# Altium PCB CPS.PcbDoc
Units mil, origin at the board's own origin, x right, y up, seen from the top; angles counter-clockwise.
Board outline 3149.61 x 3543.31 mil, 2 copper layers (Top Layer, Bottom Layer); 109 components, 77 nets, 353 pads, 68 vias.
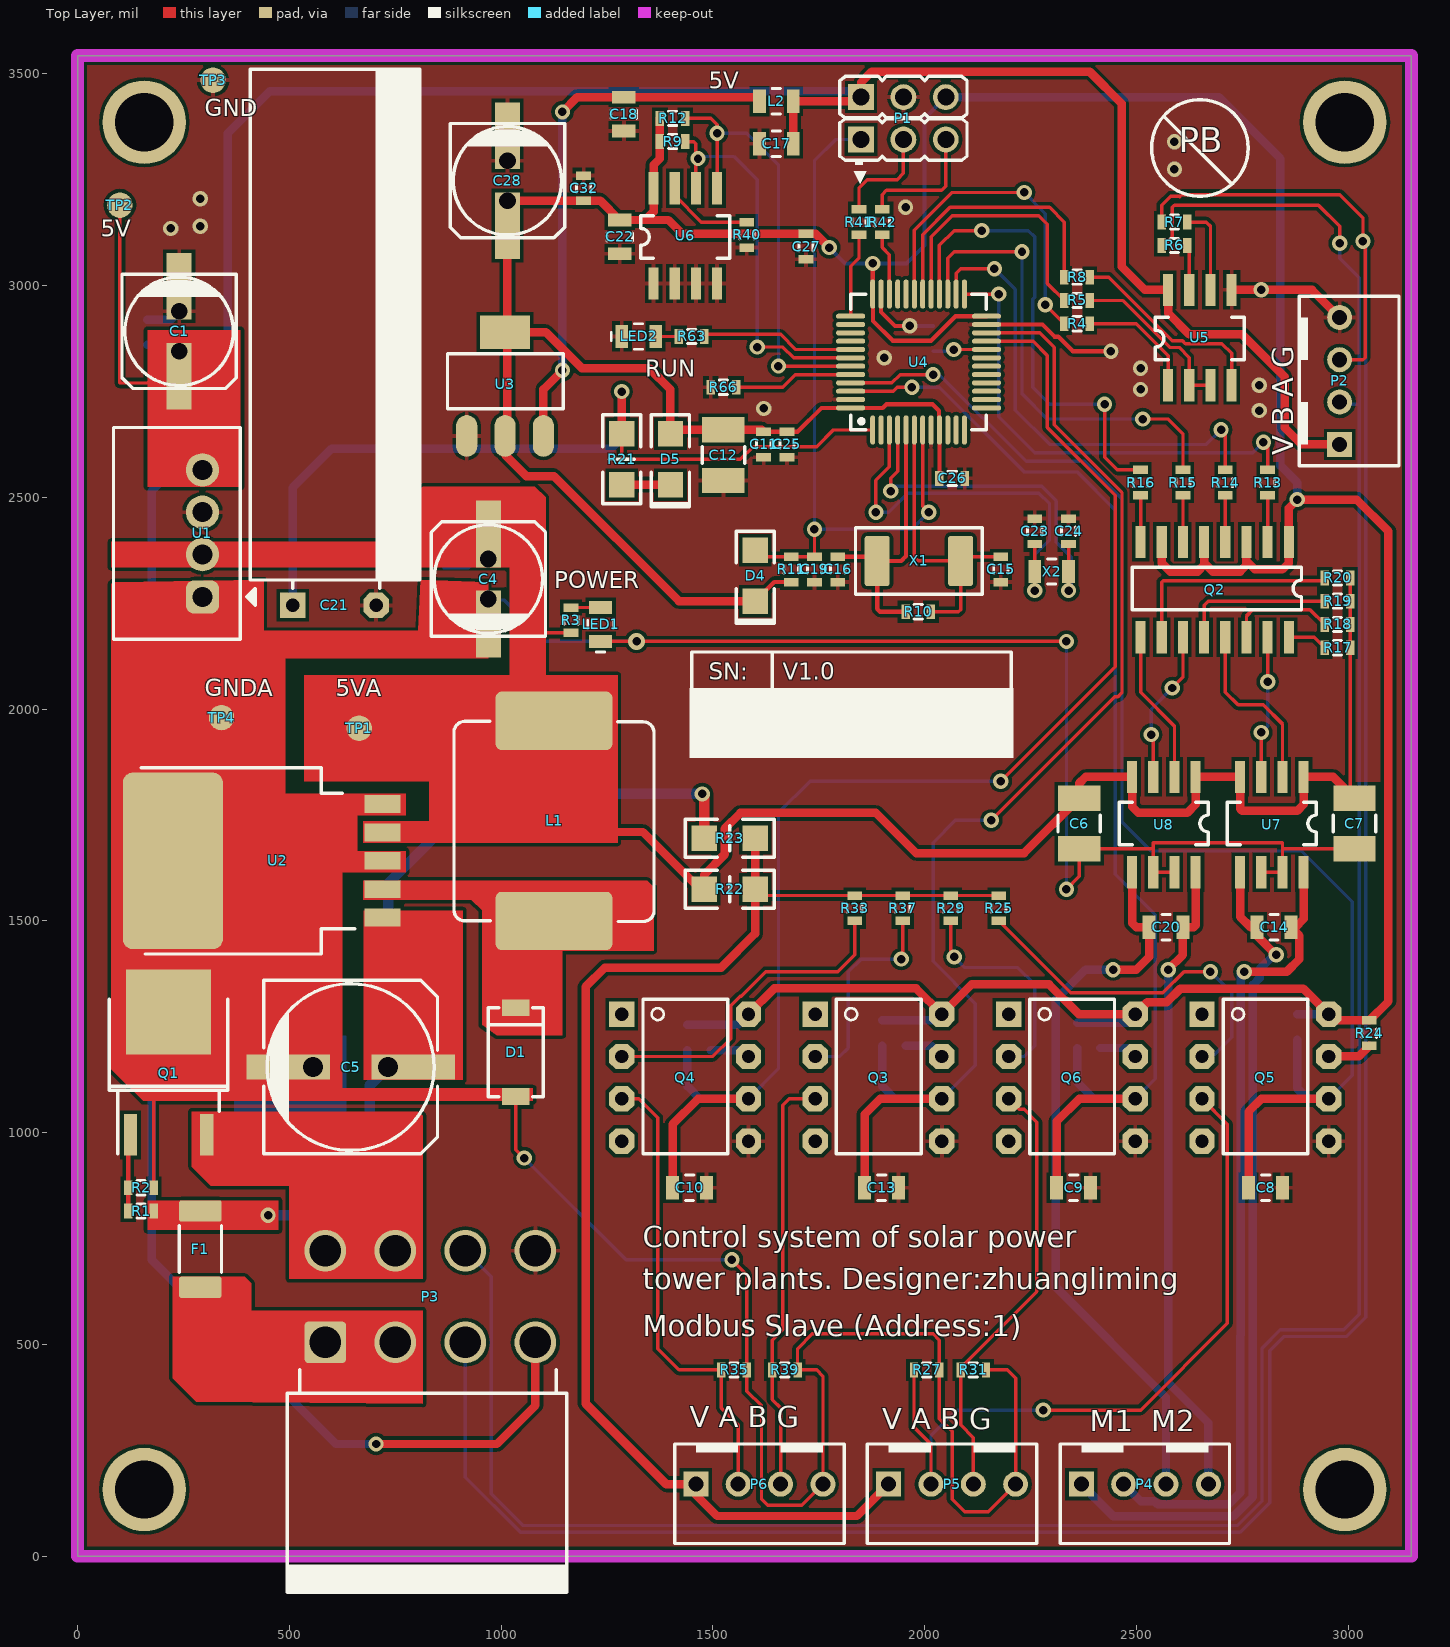
[diagram p0: Top Layer view]
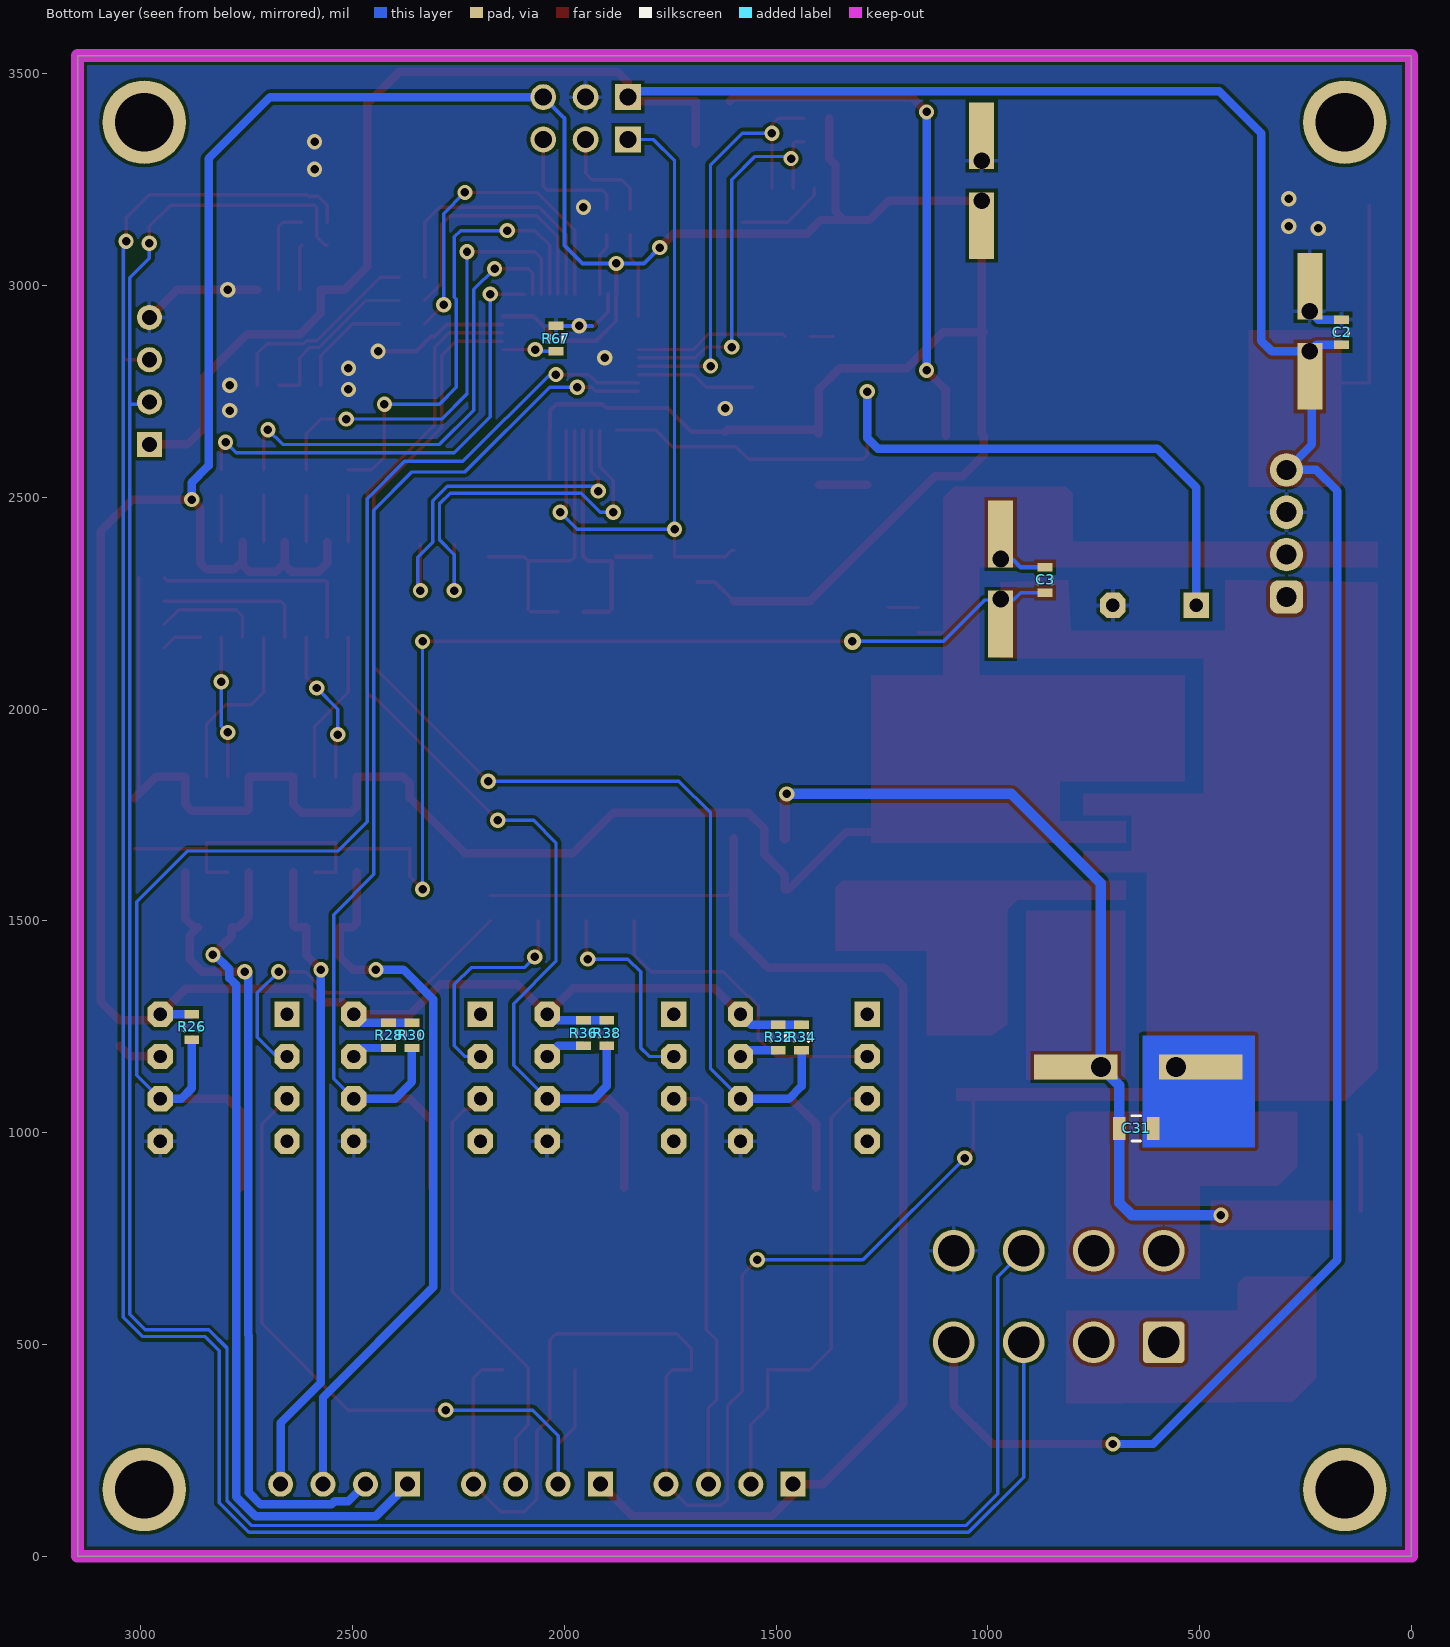
[diagram p1: Bottom Layer view, seen from below]

## Layer stack, top to bottom
Top Layer: signal copper 1.4
Dielectric: dielectric 12.6, FR-4, Dk 4.8
Bottom Layer: signal copper 1.4

## Board outline
0,0 0,3543.31 3149.61,3543.31 3149.61,0

## Design rules (kind name [scope] priority, off if disabled: settings)
Clearance [All] p1: gap=8
HoleSize [All] p1: absolutevalues=TRUE maxlimit=300 minlimit=20 maxpercent=80.000 minpercent=20.000
MinimumSolderMaskSliver [All] p1: minsoldermaskwidth=6
PolygonConnect ViaGND [IsVia] p1: connectstyle=Direct reliefconductorwidth=10 reliefentries=4 polygonreliefangle="90 Angle"
PolygonConnect [All] p2: connectstyle=Relief reliefconductorwidth=10 reliefentries=4 polygonreliefangle="90 Angle"
RoomDefinition CPS [InComponentClass('CPS')] p1: confinementstyle=ConfineOut formatcopy=TRUE lockcomponents=FALSE outline 3325,70 3675,70 3675,500 3325,500
RoutingVias [All] p1: holewidth=28 width=50 viastyle="Through Hole" minholewidth=28 minwidth=50 maxholewidth=28 maxwidth=50
SilkToSilkClearance [All] p1: silktosilkclearance=8
SilkscreenOverComponentPads [All] p1: minsilkscreentomaskgap=0
SolderMaskExpansion [All] p1: expansion=4
Width [All] p1: maxlimit=50 minlimit=8 preferedwidth=8
24 further rules are at their usual default settings.

## Components (designator, comment, footprint, x,y, rotation, side; value= is the part's Value field where it differs from the comment)
C1 "100uF 16V" SMD-D6.5MM 240,2892.24 r270 top
C2 "100nF" 0603S 165,2890 r90 bottom
C3 "100nF" 0603S 865,2305 r270 bottom
C4 "100uF 16V" SMD-D6.5MM 970,2307.24 r90 top
C5 "220uF 50V" SMD-D10MM 645,1155 r0 top
C6 "10uF" 1210S 2365,1670 r90 top
C7 "10uF" 1210S 3015,1670 r90 top
C8 "10pF" 0805S 2845,870 r180 top
C9 "10pF" 0805S 2391.67,870 r180 top
C10 "10pF" 0805S 1485,870 r180 top
C11 "100nF" 0603S 1620,2625 r90 top
C12 "10uF" 1210S 1525,2540 r90 top
C13 "10pF" 0805S 1938.33,870 r180 top
C14 "10pF" 0805S 2865,1485 r180 top
C15 "22pF" 0603S 2180,2330 r90 top
C16 "22pF" 0603S 1795,2330 r90 top
C17 "100nF" 0805S 1610,3335 r0 top
C18 "100nF" 0805S 1290,3365 r90 top
C19 "0.1uF" 0603S 1740,2330 r90 top
C20 "10pF" 0805S 2610,1485 r180 top
C21 "10F 2.7V" DIP2_90_31MM 508.15,2245 r90 top
C22 "100nF" 0805S 1280,3075 r90 top
C23 "22pF" 0603S 2260,2420 r270 top
C24 "22pF" 0603S 2340,2420 r270 top
C25 "100nF" 0603S 1675,2625 r90 top
C26 "100nF" 0603S 2065,2545 r180 top
C27 "100nF" 0603S 1720,3092 r90 top
C28 "100uF 16V" SMD-D6.5MM 1015,3247.76 r270 top
C31 "100nF" 0805S 690,1010 r180 bottom
C32 "1nF" 0603S 1195,3230 r90 top
D1 "1N5824" DO-214AC 1035,1085 r90 top
D4 "IN4148" 1206D 1600,2375 r270 top
D5 "IN4148" 1206D 1400,2650 r270 top
F1 "1A / 125V" 1810S 290,635 r90 top
L1 "33uH" SMD12X12X7 1125,1500 r90 top
L2 "6.8uH" 0805S 1610,3435 r0 top
LED1 "RED" 0805SN 1235,2240 r270 top
LED2 "RED" 0805SN 1365,2880 r180 top
P1 "Header 3X2" Header3x2 1950,3445 r0 top
P2 "H4X1P 2.54MM" HDR1X4H-2.54MM 2980,2625 r90 top
P3 "ARTHYLY 5557-2X4P" 5557_2X4P 585,505 r0 top
P4 "H4X1P 2.54MM" HDR1X4H-2.54MM 2370,170 r0 top
P5 "H4X1P 2.54MM" HDR1X4H-2.54MM 1915,170 r0 top
P6 "H4X1P 2.54MM" HDR1X4H-2.54MM 1460,170 r0 top
Q1 "2N7002" TO-253 125,995 r0 top
Q2 "TLP281-4" SOP-16 2860,2395 r180 top
Q3 "6N137" DIP8 1741.67,1280 r0 top
Q4 "6N137" DIP8 1285,1280 r0 top
Q5 "6N137" DIP8 2655,1280 r0 top
Q6 "6N137" DIP8 2198.33,1280 r0 top
R1 "10K" 0603S 150,815 r0 top
R2 "20K" 0603S 150,870 r0 top
R3 "2.7K" 0603S 1165,2210 r90 top
R4 "20R" 0603S 2360,2910 r0 top
R5 "20R" 0603S 2360,2965 r0 top
R6 "20R" 0603S 2590,3095 r180 top
R7 "20R" 0603S 2590,3150 r180 top
R8 "20R" 0603S 2360,3020 r0 top
R9 "3.7K" 0603S 1405,3340 r180 top
R10 "10M" 0603S 1985,2230 r180 top
R11 "4.7K" 0603S 1685,2330 r90 top
R12 "3.7K" 0603S 1405,3395 r180 top
R13 "1K" 0603S 2810,2535 r90 top
R14 "1K" 0603S 2710,2535 r90 top
R15 "1K" 0603S 2610,2535 r90 top
R16 "1K" 0603S 2510,2535 r90 top
R17 "1K" 0603S 2975,2145 r180 top
R18 "1K" 0603S 2975,2200 r180 top
R19 "1K" 0603S 2975,2255 r180 top
R20 "1K" 0603S 2975,2310 r180 top
R21 "1K" 1206R 1285,2650 r270 top
R22 "1K" 1206R 1600,1575 r180 top
R23 "100K" 1206R 1600,1695 r180 top
R24 "1K" 0603S 3050,1235 r270 top
R25 "1K" 0603S 2175,1530 r90 top
R26 "1K" 0603S 2880,1250 r270 bottom
R27 "100K" 0603S 2005,440 r0 top
R28 "1K" 0603S 2415,1230 r270 bottom
R29 "1K" 0603S 2061.67,1530 r90 top
R30 "1K" 0603S 2360,1230 r270 bottom
R31 "100K" 0603S 2115,440 r0 top
R32 "1K" 0603S 1495,1225 r270 bottom
R33 "1K" 0603S 1835,1530 r90 top
R34 "1K" 0603S 1440,1225 r270 bottom
R35 "100K" 0603S 1550,440 r0 top
R36 "1K" 0603S 1955,1235 r270 bottom
R37 "1K" 0603S 1948.33,1530 r90 top
R38 "1K" 0603S 1900,1235 r270 bottom
R39 "100K" 0603S 1670,440 r0 top
R40 "3.7K" 0603S 1580,3120 r90 top
R41 "1K" 0603S 1845,3150 r90 top
R42 "1K" 0603S 1900,3150 r90 top
R63 "2.7K" 0603S 1450,2880 r180 top
R66 "1K" 0603S 1525,2760 r180 top
R67 "1K" 0603S 2020,2875 r90 bottom
TP1 "5VA" T60 665,1955 r0 top
TP2 "5V" T60 100,3190 r0 top
TP3 "GND" T60 320,3485 r0 top
TP4 "GNDA" T60 340,1980 r0 top
U1 "B0505S-1WR2" "DC/DC 2.54-4P" 295,2265 r90 top
U2 "LM2596-5.0" SOT-263-5 720,1641.93 r90 top
U3 "ASM117" SOT-223 918.9,2645 r0 top
U4 "STM32F103C8T6" LQFP-48 1985.79,2819.57 r90 top
U5 "MAX485" SOP-8 2575,2765 r0 top
U6 "FM24C64" SOP-8 1360,3005 r0 top
U7 "MX618" SOP-8 2895,1840 r180 top
U8 "MX618" SOP-8 2640,1840 r180 top
X1 "8MHz" 5032 1986.57,2350 r180 top
X2 "32.768KHz" 0805S 2340,2325 r180 top

## Footprints (in the part's own frame and the unit in brackets; to place one, negate y for a bottom-side part, rotate by r counter-clockwise, add the part's x,y. Pads: shape width x height; smd on the part's side, far side on the other; paste and mask are expansions set on the pad)
0603S [mil]
  rect 20x35 smd: 1(-30,0) 2(30,0)
  silkscreen extent -10,-17 10,17
0805S [mil]
  rect 30x55 smd: 1(0,0) 2(80,0)
  silkscreen extent 30,-30 50,30
0805SN [mil]
  rect 30x55 smd: 1(0,0) 2(80,0)
  silkscreen extent 30,-30 105,30
1206D [mil]
  rect 60x60 smd: 1(0,0) 2(120,0)
  silkscreen extent -45,-45 172,45
1206R [mil]
  rect 60x60 smd: 1(0,0) 2(120,0)
  silkscreen extent -45,-45 165,45
1210S [mil]
  rect 60x100 smd: 1(0,0) 2(120,0)
  silkscreen extent 40,-50 80,50
1810S [mil]
  rrect20% 50x100 smd: 1(0,0) 2(180,0)
  silkscreen extent 35,-50 145,50
5032 [mm]
  rrect20% 1.5x3 smd: 1(-2.5,0) 2(2.5,0)
  silkscreen extent -3.8,-2 3.8,2
5557_2X4P [mm]
  rrect20% 2.5x2.5 hole 1.9: 1(0,0)
  round 2.5 hole 1.9: 2(0,5.5) 3(4.2,0) 4(4.2,5.5) 5(8.4,0) 6(8.4,5.5) 7(12.6,0) 8(12.6,5.5)
  silkscreen extent -2.29,-15 14.48,-1.65
"DC/DC 2.54-4P" [mm]
  rrect50% 2x2 hole 1.2: 1(0,0)
  round 2 hole 1.2: 2(2.54,0) 3(5.08,0) 4(7.62,0)
  silkscreen extent -2.54,-3.17 10.16,5.33
DIP2_90_31MM [mil]
  rect 60x60 hole 31.5: 1(0,0)
  oct 60x60 hole 31.5: 2(0,-196.85)
  silkscreen extent 40,-300 1266,100
DIP8 [mil]
  rect 60x60 hole 31.5: 1(0,0)
  oct 60x60 hole 31.5: 2(0,-100) 3(0,-200) 4(0,-300) 5(299.21,-300) 6(299.21,-200) 7(299.21,-100) 8(299.21,0)
  silkscreen extent 50,-330 250,35
DO-214AC [mil]
  rect 40x65 smd: 1(0,0) 2(210,0)
  silkscreen extent 0,-65 210,65
HDR1X4H-2.54MM [mm]
  rect 1.5x1.5 hole 0.9: 1(0,0)
  round 1.5 hole 0.9: 2(2.54,0) 3(5.08,0) 4(7.62,0)
  silkscreen extent -1.27,-3.56 8.89,2.41
Header3x2 [mm] "Header, 2.54mm, 3x2, TH"
  rect 1.55x1.55 hole 1.02: 1(-2.54,-2.54) 2(-2.54,0)
  round 1.55 hole 1.02: 3(0,-2.54) 4(0,0) 5(2.54,-2.54) 6(2.54,0)
  silkscreen extent -3.81,-4.06 3.81,1.24
LQFP-48 [mm]
  oval 1.75x0.3 smd: 1(-4.075,2.75) 2(-4.075,2.25) 3(-4.075,1.75) 4(-4.075,1.25) 5(-4.075,0.75) 6(-4.075,0.25) 7(-4.075,-0.25) 8(-4.075,-0.75) 9(-4.075,-1.25) 10(-4.075,-1.75) 11(-4.075,-2.25) 12(-4.075,-2.75) 25(4.075,-2.75) 26(4.075,-2.25) 27(4.075,-1.75) 28(4.075,-1.25) 29(4.075,-0.75) 30(4.075,-0.25) 31(4.075,0.25) 32(4.075,0.75) 33(4.075,1.25) 34(4.075,1.75) 35(4.075,2.25) 36(4.075,2.75)
  oval 0.3x1.75 smd: 13(-2.75,-4.075) 14(-2.25,-4.075) 15(-1.75,-4.075) 16(-1.25,-4.075) 17(-0.75,-4.075) 18(-0.25,-4.075) 19(0.25,-4.075) 20(0.75,-4.075) 21(1.25,-4.075) 22(1.75,-4.075) 23(2.25,-4.075) 24(2.75,-4.075) 37(2.75,4.075) 38(2.25,4.075) 39(1.75,4.075) 40(1.25,4.075) 41(0.75,4.075) 42(0.25,4.075) 43(-0.25,4.075) 44(-0.75,4.075) 45(-1.25,4.075) 46(-1.75,4.075) 47(-2.25,4.075) 48(-2.75,4.075)
  silkscreen extent -4.06,-4.06 4.06,4.06
SMD12X12X7 [mm]
  rrect20% 3.5x7 smd: 1(0,0) 2(12,0)
  silkscreen extent -0.03,-6 11.97,6
SMD-D6.5MM [mm]
  rect 4x1.5 hole 1 copper offset 1.5,0: 1(1.2,0)
  rect 4x1.5 hole 1 copper offset -1.5,0: 2(-1.2,0)
  silkscreen extent -3.43,-3.43 3.43,3.43
SMD-D10MM [mm]
  rect 5x1.5 hole 1.2 copper offset 1.5,0: 1(2.25,0)
  rect 5x1.5 hole 1.2 copper offset -1.5,0: 2(-2.25,0)
  silkscreen extent -5.21,-5.21 5.21,5.21
SOP-8 [mil]
  rect 24x76 smd: 1(0,0) 2(50,0) 3(100,0) 4(150,0) 5(150,225) 6(100,225) 7(50,225) 8(0,225)
  silkscreen extent -30,60 180,160
SOP-16 [mil]
  rect 24x76 smd: 1(0,0) 2(50,0) 3(100,0) 4(150,0) 5(200,0) 6(250,0) 7(300,0) 8(350,0) 9(350,225) 10(300,225) 11(250,225) 12(200,225) 13(150,225) 14(100,225) 15(50,225) 16(0,225)
  silkscreen extent -30,60 370,160
SOT-223 [mm]
  oval 1.27x2.5 smd: 1(0,0) 2(2.3,0) 3(4.6,0)
  rect 3x2 smd: 2(2.3,6.223)
  silkscreen extent -1.15,1.63 5.8,4.93
SOT-263-5 [mm]
  rect 1.07x2.16 smd: 1(-3.4,0) 2(-1.7,0) 3(0,0) 4(1.7,0) 5(3.4,0)
  rrect20% 10.6x6 smd: 3(0,12.572)
  silkscreen extent -5.59,1.65 5.59,14.48
T60 [mil]
  round 60 smd: 1(0,0)
TO-253 [mm]
  rect 0.8x2.5 smd: 1(0,0) 3(4.572,0)
  rect 5.1x5.08 smd: 2(2.286,7.366)
  silkscreen extent -1.27,-1.14 5.84,8.13

## Part data
C1 C4 C5 C21 C28: "Polar Capacitor"
C2 C3 C6 C7 C8 C9 C10 C11 C12 C13 C14 C15 C16 C17 C18 C19 C20 C22 C23 C24 C25 C26 C27 C31 C32: "Capacitor"
D1: "Schottky Barrier Double Diode"
D4 D5: library part DIO_SWITCH, "Silicon Epitaxial Planar Switching Diode,75V"
F1: library part "Fuse 1", "Fuse"
L1 L2: library part Inductor_1, "Inductor_1"
LED1 LED2: "Typical GREEN SMD LED Agilent make"
P1: "Header, 3-Pin, Dual row"
P2 P4 P5 P6: library part H4X1P
P3: library part "Header 4X2", "Header, 4-Pin, Dual row"
Q1: library part NMOS, "N-Channel MOSFET"
Q2: library part "Optocoupler 4Pass", "TLP281-4 TOSHIBA PHOTOCOUPLER GaAs IRED & PHOTO-TRANSISTOR"
R1 R2 R3 R4 R5 R6 R7 R8 R9 R10 R11 R12 R13 R14 R15 R16 R17 R18 R19 R20 R21 R22 R23 R24 R25 R26 R27 R28 R29 R30 R31 R32 R33 R34 R35 R36 R37 R38 R39 R40 R41 R42 R63 R66 R67: "Resistor"
U1: library part DC/DC, "MORNSUN DC/DC"
U2: "LM2596 SIMPLE SWITCHER? Power Converter 150-kHz  3-A Step-Down Voltage Regulator"
U4: "ST MCU,STM32F103C8T6,64Kb Flash,20Kb RAM"
U5: library part RS485, "MAXIM,RS-485/RS-422 Transceivers"
U6: library part F24CXX, "FM24C64,8K FLASH,IIC"
U7 U8: "DC 2V-9.6V Motor Contl"
X1 X2: library part XTAL, "Crystal Oscillator"

## Free pads (board coordinates)
  round 196.85 hole 137.8: ""(157.48,157.48) ""(157.48,3385.83) ""(2992.13,157.48) ""(2992.13,3385.83)

## Via types
v1: diameter 36, hole 20, Top Layer to Bottom Layer, 67 vias
v2: diameter 40, hole 20, Top Layer to Bottom Layer, 1 vias

## Nets (pads, with @x,y where several pads share a name; then routed paths per layer and width w, separated by ;. In a path a pad name is that pad's centre, name@x,y a point inside that pad or via, vN(x,y) a via of type N, cw(c..) or ccw(c..) an arc to the next point about the centre after c; other vN are vias at no path point)
5V: C1.1 C2.1 C17.2 L2.2 P1.2 P2.1 P3.7 TP2.1 U1.4 U5.8 | length 8482.5
  Top Layer w8: TP2.1 100,2770 165,2770 C1.1
  Top Layer w20: v1(705,265) 990,265 1081.06,356.06 P3.7 ; C17.2 L2.2 P1.2@1840,3435 ; P1.2 1850,3480 1875,3505 2390,3505 2465,3430 2465,3045 2520,2990 U5.8 2575,2935 2625,2885 2750,2885 2850,2785 2850,2665 2890,2625 P2.1
  Bottom Layer w20: C2.1 225,2860 C1.1 ; v1(705,265) 610,265 175,700 175,2515 225,2565 U1.4 235,2625 235,2840 C1.1 ; P1.2 1836.49,3458.51 453.51,3458.51 355,3360 355,2870 330,2845 C1.1
5VA: C3.1 C4.1 C6.2 C7.2 L1.2 R3.1 R17.1 R18.1 R19.1 R20.1 R22.2 TP1.1 U1.2 U2.4 U7.1 U7.4 U8.1 U8.4 | length 3106.2
  Top Layer w8: 1095,2180 R3.1 ; C7.2@3005,1800 R17.1 R18.1 R19.1 R20.1
  Top Layer w20: 1210,1710 1335,1710 1470,1575 R22.2 1480,1609.54 1528,1657.54 1528,1718 1565,1755 1885,1755 1980,1660 2235,1660 C6.2 2365,1825 2380,1840 U8.4 2490,1770 2505,1755 2620,1755 2640,1775 U8.1 U7.4 2745,1765 2750,1760 2880,1760 2895,1775 U7.1 2965,1840 3005,1800 C7.2
  Bottom Layer w10: C3.1 922.76,2335 940,2352.24
A: P2.3 P3.5 R7.2 | length 6398.4
  Top Layer w8: R7.2 2560,3190 2581,3211 2601.63,3211 2602.63,3210 ; 2607.63,3215 2980,3215 3035,3160 v1(3035,3105) 3040,3100 3040,2830 3035,2825 P2.3
  Bottom Layer w8: P3.5 915.71,186.66 1045.9,56.47 2744.81,56.47 2815,126.66 2815,485 2848.91,518.91 2996.54,518.91 3042,564.37 3042,3098 v1(3035,3105)
A1: P5.2 Q5.3 R27.1 | length 1766.2
  Top Layer w8: R27.1 1975,305 2015,265 P5.2 ; v1(2280,345) 2510,345 2715,550 2715,1020 Q5.3
  Bottom Layer w8: P5.2 2015,285 2075,345 v1(2280,345)
A1_IN: C8.2 Q5.6 R26.2 U4.45 | length 3224.5
  Top Layer w8: U4.45 1922.73,2770.36 1942.37,2790 v1(2020,2790)
  Top Layer w20: C8.2 2765,1050 2795,1080 Q5.6
  Bottom Layer w8: v1(2020,2790) 2035,2790 2240,2585 2377.63,2585 2466,2496.63 2466,1734 2535,1665 2890,1665 3010,1545 3010,1135.79 Q5.6
  Bottom Layer w20: R26.2 2880,1105 2905,1080 Q5.6
A2: P6.2 Q4.3 R35.1 | length 1105.9
  Top Layer w8: Q4.3 1325,1080 1370,1035 1370,490 1420,440 R35.1 1520,350 1560,310 P6.2
A2_IN: C10.2 Q4.6 R34.2 U4.21 | length 3197
  Top Layer w8: U4.21 2256.22,2868.78 2290,2835 2290,2665 2450,2505 2450,2100 v1(2180,1830)
  Top Layer w20: C10.2 1405,1020 1465,1080 Q4.6
  Bottom Layer w8: Q4.6 1655,1150.79 1655,1755 1730,1830 v1(2180,1830)
  Bottom Layer w20: R34.2 1440,1110 1470,1080 Q4.6
B: P2.2 P3.6 R6.2 | length 6254.2
  Top Layer w8: R6.2 2565,3095 2585,3115 2585,3185 2590,3190 2930,3190 2980,3140 v1(2980,3100)
  Bottom Layer w8: P3.6 977.24,660 977.24,147.76 1052.53,72.47 2738.18,72.47 2796.71,131 2796.71,491.71 2839.91,534.91 2989.91,534.91 3026,571 3026,2720 ; P2.2 2985,2720 3026,2720 ; v1(2980,3100) 2980,3065 3026,3019 3026,2720
B1: P5.3 Q6.3 R31.1 | length 1031.4
  Top Layer w8: P5.3 2115,280 2085,310 R31.1 2085,445 2265,625 2265,1025 2235,1055 2223.33,1055 Q6.3
B1_IN: C9.2 Q6.6 R30.2 U4.46 | length 2796.4
  Top Layer w8: U4.46 1925.67,2750.67 1935,2760 v1(1970,2760)
  Top Layer w20: C9.2 2311.67,1026.67 2365,1080 Q6.6
  Bottom Layer w8: v1(1970,2760) 2035,2760 2235,2560 2360,2560 2450,2470 2450,1610 2545,1515 2545,1127.45 Q6.6
  Bottom Layer w20: R30.2 2360,1120 2400,1080 Q6.6
B2: P6.3 Q3.3 R39.1 | length 996.5
  Top Layer w8: P6.3 1660,350 1640,370 R39.1 1640,510 1665,535 1665,1065 1680,1080 Q3.3
B2_IN: C13.2 Q3.6 R38.2 U4.22 | length 2946.9
  Top Layer w8: U4.22 2271.53,2888.47 2306,2854 2306,2671.63 2466,2511.63 2466,2038.37 2456.63,2029 2449,2029 v1(2157.5,1737.5)
  Top Layer w20: C13.2 1858.33,1043.33 1895,1080 Q3.6
  Bottom Layer w8: Q3.6 2120,1159.12 2120,1305 2020,1405 2020,1685 2072.5,1737.5 v1(2157.5,1737.5)
  Bottom Layer w20: R38.2 1900,1110 1930,1080 Q3.6
BOOT0: R66.1 U4.44 | length 282.8
  Top Layer w8: R66.1 1665,2760 1695.04,2790.04 U4.44
BOOT1: R67.1 U4.20 | length 133.7
  Top Layer w8: v1@2065,2845 v1(2069.1,2849.1) U4.20
  Bottom Layer w8: R67.1 2065,2845 v1(2069.1,2849.1)
DOWN: R16.2 U4.28 | length 1126.8
  Top Layer w8: U4.28 2035,3095 2070,3130 v1(2135,3130) ; v1(2425,2720) 2425,2595 2455,2565 R16.2
  Bottom Layer w8: v1(2135,3130) 2245,3130 2260,3115 2260,2972.43 2255,2967.43 2255,2760 2295,2720 v1(2425,2720)
GNDA: C3.2 C4.2 C5.2 C6.1 C7.1 C31.2 D1.1 LED1.2 P5.4 P6.4 Q1.2 R2.2 R27.2 R31.2 R35.2 R39.2 TP4.1 U1.1 U2.3 U2.5 U7.6 U7.7 U8.6 U8.7 | length 6552.7
  Top Layer w8: 175,1095 180,1090 R2.2 ; D1.1 1035,960 v1(1055,940) ; LED1.2 v2(1320,2160) v1(2335,2160) ; v1(1545,700) 1580,665 R35.2 1580,390 1615,355 1615,135 1630,120 1710,120 P6.4 1760,425 1745,440 R39.2 1700,490 1735,525 2020,525 2035,510 R27.2 2035,325 2065,295 2065,135 2095,105 2150,105 P5.4 2215,420 2195,440 R31.2 ; v1(2335,1575) 2365,1605 C6.1 2540,1670 ; U8.7 U8.6 2540,1670 ; U7.6 U7.7 2845,1670 ; C7.1 2845,1670 ; 2540,1670 2540,1685 2845,1685 2845,1670
  Bottom Layer w8: C3.2 922.76,2275 940,2257.76 1007.24,2257.76 1105,2160 v2(1320,2160) ; v1(1055,940) 1295,700 v1(1545,700) ; v1(2335,1575) v1(2335,2160)
LIFT: R13.2 U4.25 | length 1110.6
  Top Layer w8: U4.25 v1(2175,2980) ; v1(2800,2630) 2810,2620 R13.2
  Bottom Layer w8: v1(2175,2980) 2175,2690 2260,2605 2775,2605 v1(2800,2630)
NetC14_1: C14.1 P4.2 U7.8 | length 1912.2
  Top Layer w20: v1(2755,1380) 2855,1380 2885,1410 2885,1465 C14.1 2875,1485 2895,1505 U7.8
  Bottom Layer w20: P4.2 2510,130 2542.79,130 2550.31,122.47 2717.47,122.47 2745,150 2745,520.71 2747,522.71 2747,1377 v1@2750,1380
NetC14_2: C14.2 P4.1 U7.5 | length 1994.6
  Top Layer w20: U7.5 2745,1510 2770,1485 C14.2 2785,1465 v1(2830,1420)
  Bottom Layer w20: P4.1 2445.53,94.47 2729.07,94.47 2774.71,140.11 2774.71,510.82 2775,511.11 2775,1349.09 2791,1365.09 2791,1386 v1@2825,1420
NetC18_2: C18.2 L2.1 U3.3 | length 1267.3
  Top Layer w20: U3.3 1100,2755 v1(1145,2800) ; v1(1145,3410) 1180,3445 1600,3445 L2.1
  Bottom Layer w20: v1(1145,2800) v1(1145,3410)
NetC20_1: C20.1 P4.4 U8.8 | length 1525.9
  Top Layer w20: v1(2575,1385) 2610,1420 C20.1 2635,1485 2640,1490 U8.8
  Bottom Layer w20: v1(2575,1385) 2575,410 2670,315 P4.4
NetC20_2: C20.2 P4.3 U8.5 | length 1748.3
  Top Layer w20: v1(2445,1385) 2500,1385 2530,1415 C20.2 2500,1485 2490,1495 U8.5
  Bottom Layer w20: v1(2445,1385) 2380,1385 2310,1315 2310,635 2570,375 P4.3
NetC21_1: C21.1 R21.1 U4.1 | length 1988.7
  Top Layer w8: R21.1 1285,2600 1295,2590 1565,2590 1595,2620 1745,2620 1784.13,2659.13 U4.1
  Top Layer w20: R21.1 v1(1285,2750)
  Bottom Layer w20: C21.1 508.15,2523.15 600,2615 1260,2615 1285,2640 v1(1285,2750)
NetD1_2: D1.2 L1.1 U2.2
NetD5_2: D5.2 R21.2 | length 115
  Top Layer w20: R21.2 D5.2
NetLED1_1: LED1.1 R3.2 | length 70
  Top Layer w8: R3.2 LED1.1
NetLED2_1: LED2.1 R63.2 | length 55
  Top Layer w8: LED2.1 R63.2
NetP1_3: P1.3 R41.2 | length 249.5
  Top Layer w8: R41.2 1845,3230 1865,3250 1935,3250 1950,3265 P1.3
NetP1_5: P1.5 R42.2 | length 303.3
  Top Layer w8: R42.2 1900,3215 1910,3225 2040,3225 2050,3235 P1.5
NetQ1_1: Q1.1 R1.1 R2.1 | length 182.1
  Top Layer w10: R1.1 R2.1 120,990 Q1.1
NetQ2_2: Q2.2 R13.1 | length 110
  Top Layer w8: Q2.2 R13.1
NetQ2_4: Q2.4 R14.1 | length 110
  Top Layer w8: Q2.4 R14.1
NetQ2_6: Q2.6 R15.1 | length 110
  Top Layer w8: Q2.6 R15.1
NetQ2_8: Q2.8 R16.1 | length 110
  Top Layer w8: Q2.8 R16.1
NetQ2_9: Q2.9 U8.2 | length 363.1
  Top Layer w8: Q2.9 2510,2040 2590,1960 U8.2
NetQ2_10: Q2.10 R20.2 | length 519.1
  Top Layer w8: Q2.10 2560,2300 2563,2303 2938,2303 R20.2
NetQ2_11: Q2.11 U8.3 | length 370.2
  Top Layer w8: v1(2535,1940) 2540,1935 U8.3 ; v1@2580,2045 v1(2585,2050) 2610,2075 Q2.11
  Bottom Layer w8: v1(2535,1940) 2535,2000 v1(2585,2050)
NetQ2_12: Q2.12 R19.2 | length 364.1
  Top Layer w8: Q2.12 2660,2245 2670,2255 R19.2
NetQ2_13: Q2.13 U7.2 | length 421.1
  Top Layer w8: Q2.13 2710,2040 2740,2010 2800,2010 2845,1965 U7.2
NetQ2_14: Q2.14 R18.2 | length 255.7
  Top Layer w8: Q2.14 2760,2220 2775,2235 2910,2235 R18.2
NetQ2_15: Q2.15 U7.3 | length 336.2
  Top Layer w8: U7.3 v1(2795,1945) ; v1(2810,2065) Q2.15
  Bottom Layer w8: v1(2795,1945) 2810,1960 v1(2810,2065)
NetQ2_16: Q2.16 R17.2 | length 95.4
  Top Layer w8: Q2.16 2920,2170 R17.2
NetQ3_2: Q3.2 R37.1 | length 495.4
  Top Layer w8: v1(1945,1410) 1948.33,1413.33 R37.1
  Bottom Layer w8: Q3.2 1800,1180 1820,1200 1820,1380 1850,1410 v1(1945,1410)
NetQ3_7: Q3.7 R36.2 | length 96.2
  Bottom Layer w20: R36.2 2015.88,1205 Q3.7
NetQ4_2: Q4.2 R33.1 | length 775
  Top Layer w8: Q4.2 1500,1180 1542.21,1222.21 1542.21,1299.97 1564.24,1322 1567,1322 1625,1380 1795,1380 1835,1420 R33.1
NetQ4_7: Q4.7 R32.2 | length 95.4
  Bottom Layer w20: R32.2 1569.21,1195 Q4.7
NetQ5_2: Q5.2 R25.1 | length 855.5
  Top Layer w8: R25.1 2345,1330 2562.43,1330 2612.43,1380 v1(2675,1380)
  Bottom Layer w8: Q5.2 2680,1180 2725,1225 2725,1330 v1(2675,1380)
NetQ5_7: Q5.7 R24.2 | length 106.1
  Top Layer w20: Q5.7 3025,1180 R24.2
NetQ6_2: Q6.2 R29.1 | length 522.4
  Top Layer w8: R29.1 2061.67,1423.33 v1(2070,1415)
  Bottom Layer w8: v1(2070,1415) 2095,1390 2220,1390 2260,1350 2260,1205 2235,1180 Q6.2
NetQ6_7: Q6.7 R28.2 | length 90.8
  Bottom Layer w20: R28.2 2477.55,1200 Q6.7
NetR4_2: R4.2 U5.1 | length 285.9
  Top Layer w8: R4.2 2499.75,2910 2575,2834.75 U5.1
NetR5_2: R5.2 U5.2 U5.3 | length 405.9
  Top Layer w8: R5.2 2467.37,2965 2578.37,2854 2601,2854 2625,2830 U5.2 U5.3
NetR6_1: R6.1 U5.7 | length 107.1
  Top Layer w8: R6.1 2625,3090 U5.7
NetR7_1: R7.1 U5.6 | length 209.1
  Top Layer w8: R7.1 2665,3150 2675,3140 U5.6
NetR8_2: R8.2 U5.4 | length 484.6
  Top Layer w8: R8.2 2435,3020 2585,2870 2608.89,2870 2615.89,2863 2702,2863 2725,2840 U5.4
NetR40_2: R40.2 U6.7 | length 213.1
  Top Layer w8: U6.7 1410,3213.03 1473.03,3150 R40.2
NetR63_1: R63.1 U4.41 | length 362.3
  Top Layer w8: R63.1 1485,2885 1660,2885 1695.9,2849.1 U4.41
NRST: C19.2 D4.1 P1.1 R11.2 U4.7 | length 1704.8
  Top Layer w8: D4.1 1605,2375 1620,2360 R11.2 C19.2 v1(1740,2425) ; U4.7 1995.63,2479.37 v1(2010,2465)
  Bottom Layer w8: v1(1740,2425) v1@1740,2440 ; P1.1 1790,3345 1740,3295 v1@1740,2440 ; v1(2010,2465) 1970,2425 1755,2425 v1@1740,2440
OSC32_IN: C23.2 U4.3 X2.2 | length 975.8
  Top Layer w8: v1(1885,2465) 1885,2540 1916.89,2571.89 U4.3 ; v1(2260,2280) X2.2 C23.2
  Bottom Layer w8: v1(1885,2465) 1915,2465 1960,2510 2270,2510 2295,2485 2295,2400 2260,2365 v1(2260,2280)
OSC32_OUT: C24.2 U4.4 X2.1 | length 900
  Top Layer w8: v1(1920,2515) 1920,2545 1936.58,2561.58 U4.4 ; v1(2340,2280) X2.1 C24.2
  Bottom Layer w8: v1(1920,2515) 1931,2526 2276.63,2526 2311,2491.63 2311,2394 2346.75,2358.25 2346.75,2286.75 v1(2340,2280)
OSC_IN: C16.2 R10.2 U4.5 X1.2 | length 636.6
  Top Layer w10: C16.2 X1.2@1878.15,2360 ; R10.2 1895,2230 1888.15,2236.85 X1.2 1945,2350 1956.26,2361.26 U4.5
OSC_OUT: C15.2 R10.1 U4.6 X1.1 | length 699.1
  Top Layer w8: U4.6 1975.95,2359.05 1985,2350 X1.1 ; R10.1 2080,2230 2085,2235 X1.1 ; C15.2 2095,2360 X1.1
POWER+: F1.1 P3.1 P3.3
POWER-: P3.2 P3.4 Q1.3
RIGHT: R14.2 U4.26 | length 1131.9
  Top Layer w8: U4.26 2074.37,3029.37 2085,3040 v1(2165,3040) ; v1(2700,2660) 2710,2650 R14.2
  Bottom Layer w8: v1(2165,3040) 2214,2991 2214,2706 2295,2625 2665,2625 v1(2700,2660)
SCL: R9.1 U4.42 U6.6 | length 925.8
  Top Layer w8: R9.1 1455,3340 1460,3335 U6.6 ; v1(1605,2855) 1665,2855 1690.59,2829.41 U4.42
  Bottom Layer w8: v1@1460,3305 1550,3305 1605,3250 v1(1605,2855)
  other v1: 1465,3300
SDA: R12.1 U4.43 U6.5 | length 1051.7
  Top Layer w8: R12.1 1495,3395 1510,3380 U6.5 ; v1@1660,2800 1669.73,2809.73 U4.43
  Bottom Layer w8: v1(1510,3360) 1580,3360 1655,3285 v1(1655,2810)
SWCLK: R41.1 U4.37 | length 200.3
  Top Layer w8: U4.37 1825.35,3045.35 1845,3065 R41.1
SWDIO: R42.1 U4.34 | length 147
  Top Layer w8: R42.1 1900,3090 1916.89,3073.11 U4.34
UP: R15.2 U4.27 | length 1105.7
  Top Layer w8: U4.27 2054.69,3064.69 2070,3080 v1(2230,3080) ; v1(2515,2685) 2575,2685 2610,2650 R15.2
  Bottom Layer w8: v1(2230,3080) 2230,2745 2290,2685 v1(2515,2685)
USART1_EN: R5.1 U4.29 | length 635.4
  Top Layer w8: U4.29 2015.32,3115.32 2065,3165 2270,3165 2290,3145 2290,3005 R5.1
USART1_RX: R4.1 U4.31 | length 796.2
  Top Layer w8: U4.31 1975.95,3130.95 2065,3220 v1(2235,3220) ; v1(2285,2955) R4.1
  Bottom Layer w8: v1(2235,3220) 2285,3170 v1(2285,2955)
USART1_TX: R8.1 U4.30 | length 646.2
  Top Layer w8: U4.30 1995.63,3120.63 2060,3185 2295,3185 2330,3150 R8.1
VCC: C5.1 C31.1 F1.2 R1.2 R23.2 U2.1 | length 1960.1
  Top Layer w25: v1(1475,1800) 1480,1795 R23.2
  Bottom Layer w25: v1(450,805) 660,805 690,835 C31.1 690,1111.42 C5.1 733.58,1588.58 945,1800 v1(1475,1800)
VCC_AB: P5.1 P6.1 R22.1 R23.1 R25.2 R29.2 R33.2 R37.2 | length 3113.5
  Top Layer w8: R22.1 1615,1560 R33.2 R37.2 R29.2 R25.2
  Top Layer w20: R23.1 R22.1 1600,1470 1520,1390 1245,1390 1200,1345 1200,360 1390,170 P6.1 1460,145 1510,95 1840,95 P5.1
VDD: C11.2 C12.2 C22.2 C25.2 C26.2 C27.2 C28.1 C32.1 D4.2 D5.1 P1.6 Q2.1 Q2.3 Q2.5 Q2.7 Q3.8 Q4.8 Q5.8 Q6.8 R9.2 R11.1 R12.2 R24.1 R26.1 R28.1 R30.1 R32.1 R34.1 R36.1 R38.1 U3.2 U4.9 U4.24 U4.36 U4.48 U6.8 | length 10852
  Top Layer w10: D4.2 1645,2300 R11.1 ; C11.2 1700,2655 1756.3,2711.3 U4.48 1901.3,2711.3 1910,2720 2018.95,2720 2034.22,2704.73 2034.22,2659.91 U4.9 C26.2 ; v1(1877.52,3052.52) U4.36 1878.3,2979.22 1878.3,2916.7 1925,2870 2015,2870 2072.84,2927.84 U4.24
  Top Layer w20: U3.2@1009.45,2890.02 U3.2@1015,2890.02 ; R12.2 R9.2 1375,3300 1360,3285 U6.8 1360,3175 1340,3155 ; D5.1 1400,2755 1350,2805 1190.91,2805 1105.9,2890.02 U3.2@1015,2890.02 ; D5.1@1410,2660 C12.2 1615,2660 C11.2 ; Q4.8 1645,1340.79 1980.09,1340.79 Q3.8 2110.88,1350 2293.89,1350 2363.89,1280 Q6.8 2525.55,1308 2571.54,1308 2603.54,1340 2894.21,1340 Q5.8 2969.21,1265 R24.1 3095,1310 3095,2420 3020,2495 v1(2880,2495) 2860,2475 Q2.1 2860,2345 2845,2330 2780,2330 2760,2350 ; D4.2 1420,2255 1125,2550 1060,2550 1009.45,2600.55 1009.45,2645 1015,2650.55 U3.2@1015,2890.02 ; v1(1775,3090) 1743,3122 C27.2 1428,3122 1395,3155 1340,3155 ; Q2.7 2560,2345 2580,2325 2645,2325 2660,2340 2665,2340 ; Q2.5 2660,2345 2665,2340 ; Q2.3 2760,2350 ; U3.2@1015,2890.02 C28.1 1234.49,3200.51 C22.2 1340,3155 ; 2665,2340 2680,2325 2745,2325 2760,2340 2760,2350
  Bottom Layer w10: v1(1775,3090) 1812.48,3052.52 v1(1877.52,3052.52) 1957.52,3052.52 2000,3095 2000,3395 P1.6
  Bottom Layer w20: R34.1 R32.1 1559.21,1255 Q4.8 ; R38.1 R36.1 2025.88,1265 Q3.8 ; P1.6 2695,3445 2840,3300 2840,2575 2880,2535 v1(2880,2495) ; R30.1 R28.1 2477.55,1260 Q6.8 ; R26.1 Q5.8
VSS: C1.2 C2.2 C8.1 C9.1 C10.1 C11.1 C12.1 C13.1 C15.1 C16.1 C17.1 C18.1 C19.1 C21.2 C22.1 C23.1 C24.1 C25.1 C26.1 C27.1 C28.2 C32.2 LED2.2 P1.4 P2.4 P3.8 Q3.5 Q4.5 Q5.5 Q6.5 R40.1 R66.2 R67.2 TP3.1 U1.3 U3.1 U4.8 U4.23 U4.35 U4.47 U5.5 U6.1 U6.2 U6.3 U6.4 | length 898.5
  Top Layer w10: U4.35 1897.21,2937.79 1930,2905 v1(1965,2905) ; U4.23 2278.35,2908.15 2307,2879.5 2315.5,2879.5 2350,2845 v1@2445,2845
  Top Layer w20: U5.5 2915,2990 P2.4
  Bottom Layer w10: 1935,2905 v1(1965,2905) R67.2
  Bottom Layer w20: C2.2 220.51,2920 C1.2
  other v1: 2790,2705 1620,2710 2510,2755 2790,2765 2510,2805 1905,2830 2440,2845 2795,2990 220,3135 290,3140 1955,3185 290,3205 2590,3275 2590,3340
pads on no net: Q3.1 Q3.4 Q4.1 Q4.4 Q5.1 Q5.4 Q6.1 Q6.4 U4.2 U4.10 U4.11 U4.12 U4.13 U4.14 U4.15 U4.16 U4.17 U4.18 U4.19 U4.32 U4.33 U4.38 U4.39 U4.40

## Polygon pours and split planes (outlines as drawn)
VSS on Bottom Layer "Top Layer-No Net 1" (solid, pour order 6): 0,3543.31 3149.61,3543.31 3149.61,9.61 3140,0 0,0 0,3543.31
VSS on Top Layer "Top Layer-No Net 1" (solid, remove dead copper, pour order 8): 0,0 0,3543.31 3149.61,3543.31 3149.61,0 0,0

## Keep-outs
Keep-Out Layer:
  the board outline again, w30

## Other copper
Top Layer:
  rectangle net VCC: 675,1125 910,1525
  rectangle net GNDA: 555,1075 1075,1105
  rectangle net 5V: 165,2525 385,2895
  rectangle net VCC: 165,770 475,840
  region net GNDA: 80,1150 155,1075 600,1075 625,1100 625,1615 775,1615 775,1665 660,1665 660,1750 775,1750 775,1800 490,1800 490,2120 970,2120 970,2300 810,2305 805,2185 440,2185 440,2305 85,2300 80,2295.71
  region net NetD1_2: 675,1595 675,1550 930,1550 955,1525 955,1255 990,1230 1145,1230 1145,1430 1360,1430 1360,1580 1345,1595
  region net POWER+: 225,660 225,420 280,365 815,360 815,580 410,580 410,645 395,660
  region net 5VA: 80,2395 800,2395 800,2510 815,2525 1080,2525 1105,2500 1105,2080 1275,2080 1275,1685 675,1685 675,1735 830,1735 830,1830 535,1830 535,2080 1020,2080 1020,2335 80,2335
  region net POWER-: 270,1050 270,920 315,875 500,875 500,655 815,655 815,1040 805,1050
Bottom Layer:
  rectangle net GNDA: 370,965 635,1230

## Silkscreen, mask and mechanical layers (free items; w line width, h text height)
Top Overlay:
  circle w8: c2650,3325 r114.02
  region: 2210,2050 1445,2050 1445,1885 2210,1885
  region: 1832.5,3270 1847.5,3240 1862.5,3270
  lines w8: 1450,2035 1450,2135 2205,2135 2205,2035 ; 1640,2045 1640,2135 ; 2565,3400 2725,3240
  text "5V" at 1490,3465 h40
  text "GND" at 300,3400 h40
  text "PB" at 2600,3295 h100
  text "5V" at 55,3115 h40
  text "RUN" at 1340,2785 h40
  text "V B A G" at 2870,2600 h50 r90
  text "POWER" at 1125,2285 h40
  text "SN:" at 1490,2070 h40
  text "V1.0" at 1665,2070 h40
  text "GNDA" at 300,2030 h40
  text "5VA" at 610,2030 h40
  text "Control system of solar power" at 1335,730 h50
  text "tower plants. Designer:zhuangliming" at 1335,630 h50
  text "Modbus Slave (Address:1)" at 1335,520 h50
  text "V A B G" at 1445,305 h50
  text "V A B G" at 1900,300 h50
  text "M1  M2" at 2390,295 h50
Mechanical 1:
  lines w30: 3149.61,3540 3149.61,0 0,0 0,3543.31 3149.61,3543.31